# Altium PCB STM32.PcbDoc
Units mil, origin at the board's own origin, x right, y up, seen from the top; angles counter-clockwise.
Board outline 3937.01 x 3937.01 mil, 2 copper layers (Top Layer, Bottom Layer); 127 components, 126 nets, 543 pads, 82 vias.
Unrouted connection lines stored in the file: 192.
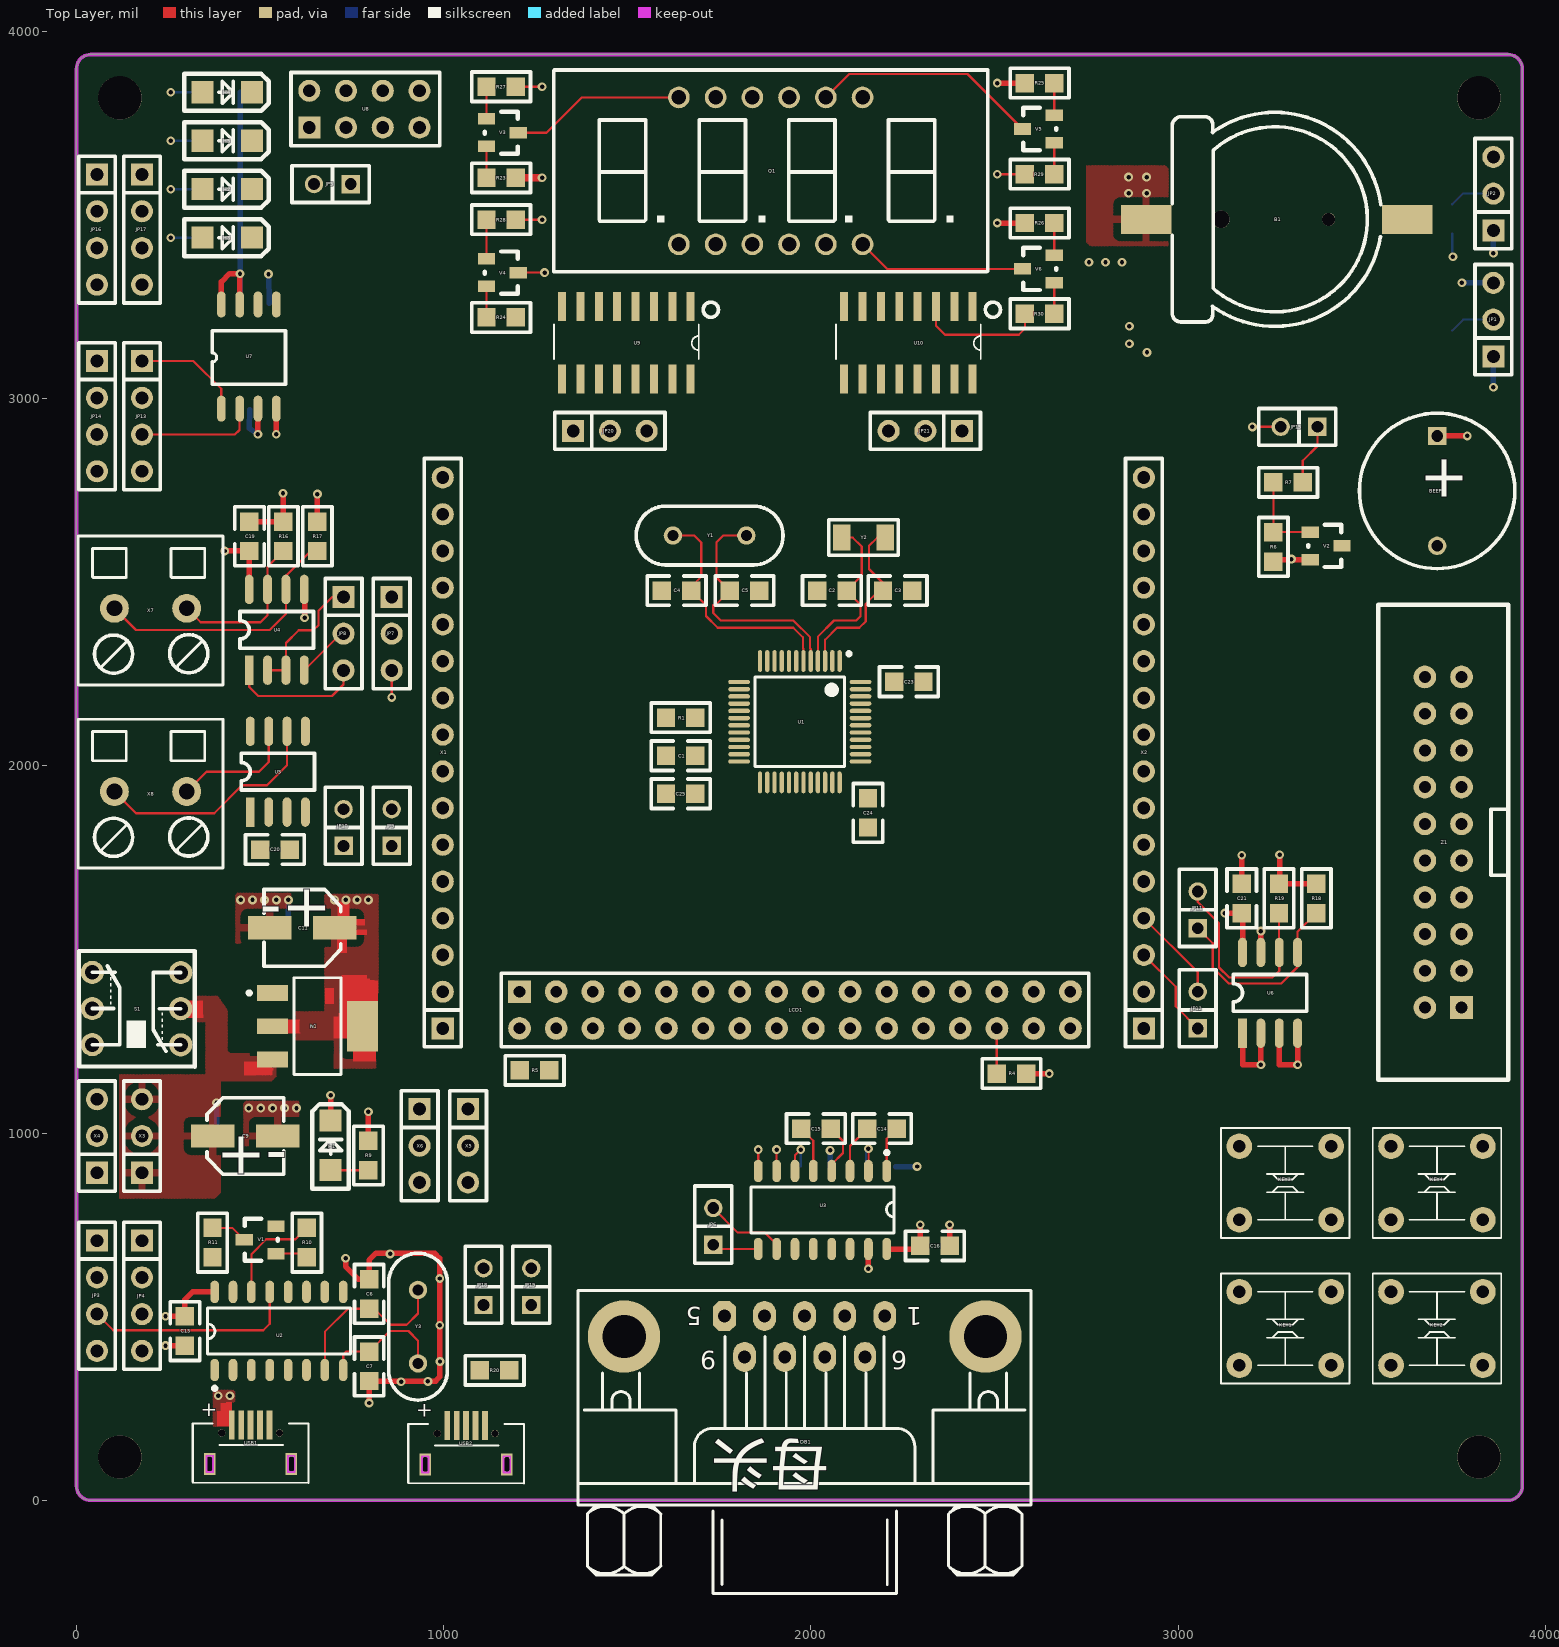
[diagram p0: Top Layer view]
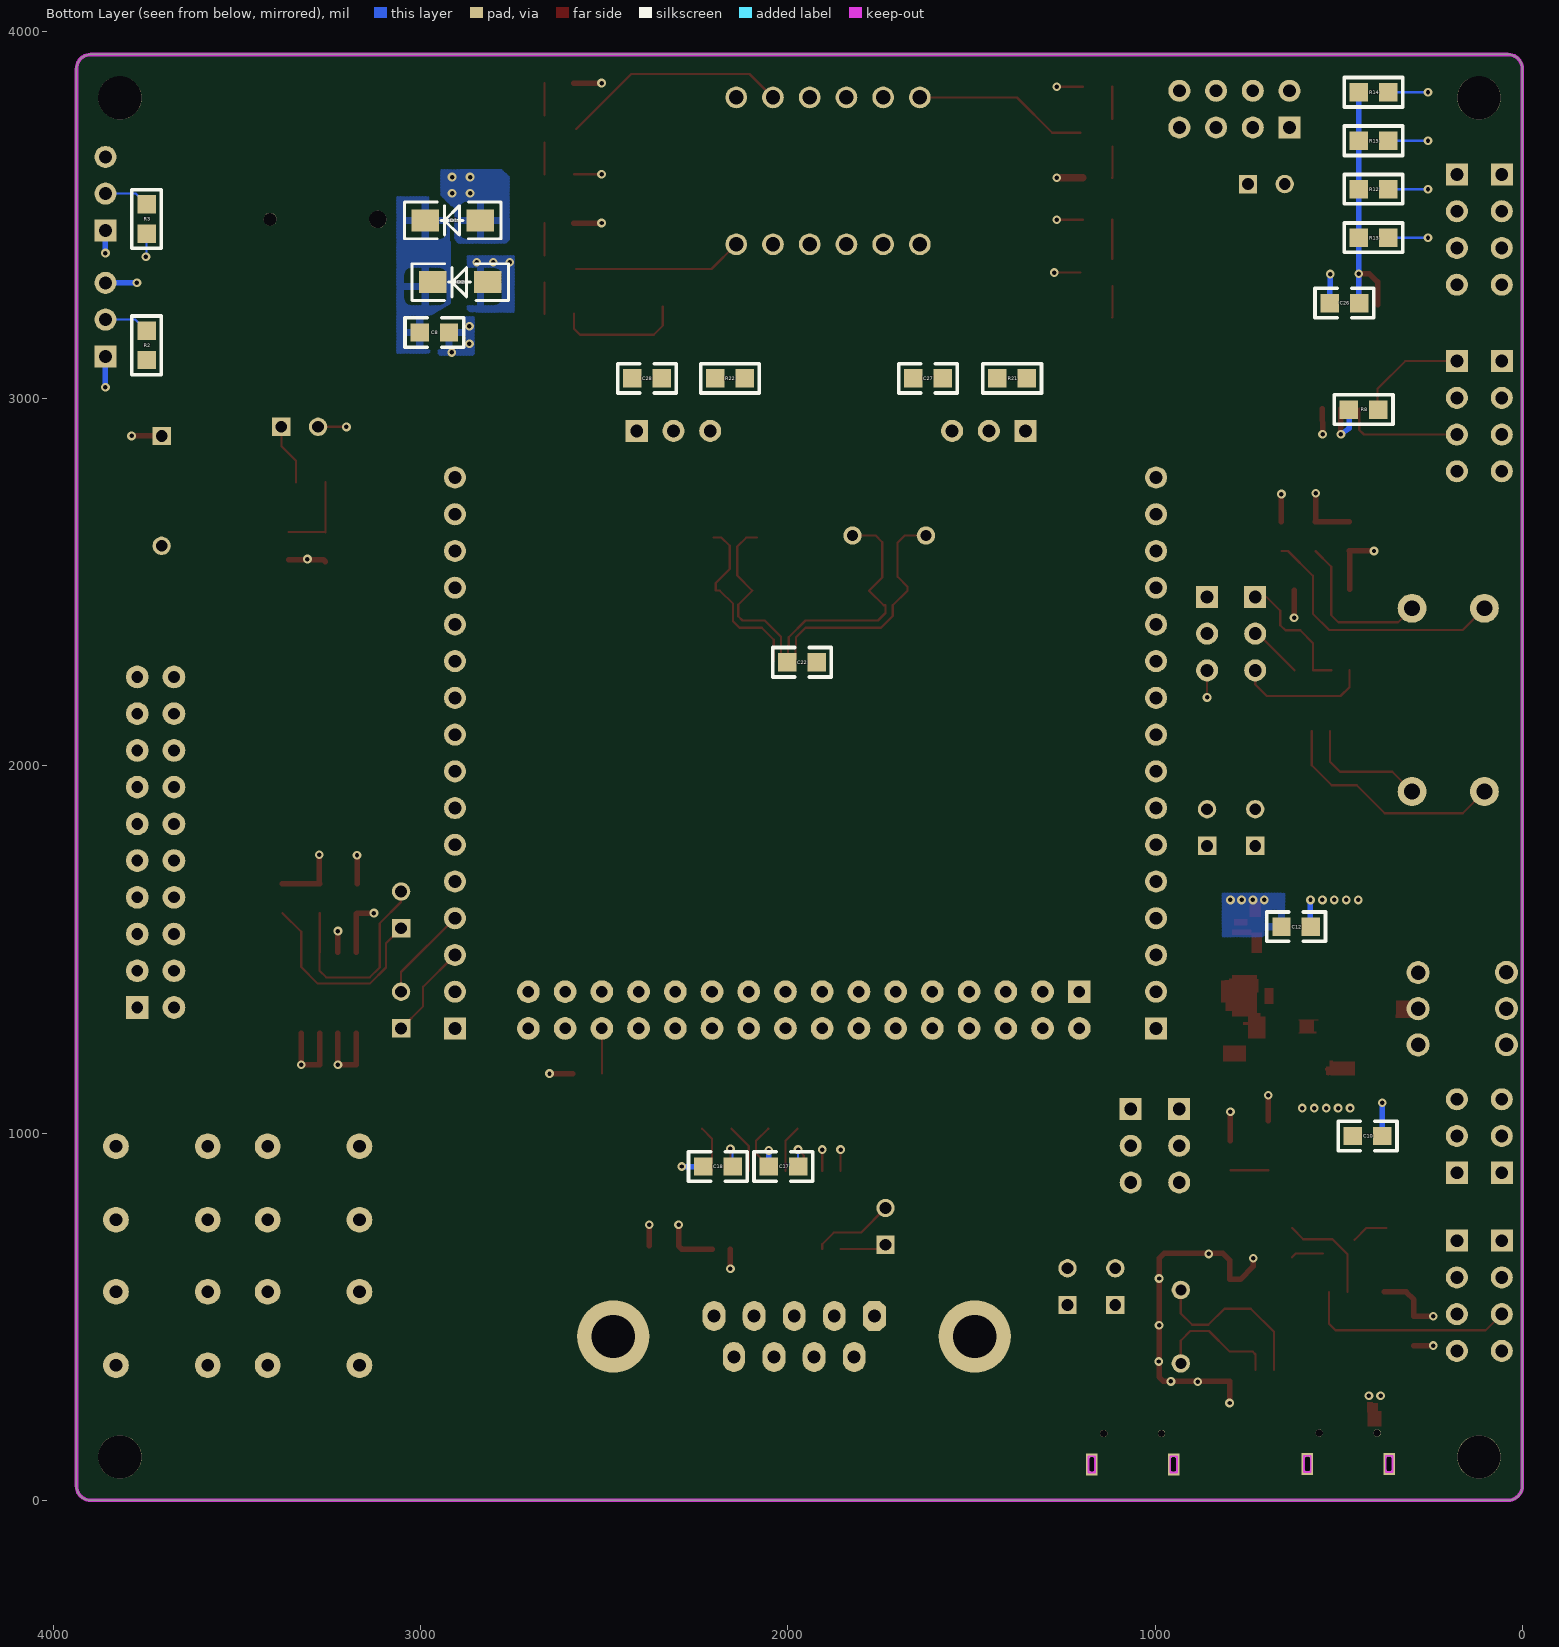
[diagram p1: Bottom Layer view, seen from below]

## Layer stack, top to bottom
Top Solder: solder mask 0.4, Solder Resist, Dk 3.5
Top Layer: signal copper 1.4
Dielectric 1: dielectric 12.6, FR-4, Dk 4.8
Bottom Layer: signal copper 1.4
Bottom Solder: solder mask 0.4, Solder Resist, Dk 3.5

## Board outline
0,39.37 0,3897.63 cw(c39.37,3897.63) 39.37,3937 39.37,3937.01 3897.64,3937.01 3897.63,3937 cw(c3897.63,3897.63) 3937,3897.63 3937.01,3897.64 3937.01,39.37 3937,39.37 cw(c3897.63,39.37) 3897.63,0 39.37,0 cw(c39.37,39.37)

## Design rules (kind name [scope] priority, off if disabled: settings)
Clearance via-polygon [IsVia vs Inpolygon] p1: gap=6 ignorepadtopadclearanceinfootprint=FALSE
Clearance polygon [InPolygon] p2: gap=10 ignorepadtopadclearanceinfootprint=FALSE
Clearance all [All] p3: gap=6 ignorepadtopadclearanceinfootprint=FALSE
DiffPairsRouting DiffPairsRouting_90OM [All] p1: maxlimit=7 minlimit=7 mostfreqgap=7 toplayer_minwidth=6 toplayer_maxwidth=6 toplayer_prefwidth=6 bottomlayer_minwidth=6 bottomlayer_maxwidth=6 bottomlayer_prefwidth=6 maxuncoupledlength=500
DiffPairsRouting [All] p2: maxlimit=10 minlimit=10 mostfreqgap=10 toplayer_minwidth=15 toplayer_maxwidth=15 toplayer_prefwidth=15 bottomlayer_minwidth=15 bottomlayer_maxwidth=15 bottomlayer_prefwidth=15 maxuncoupledlength=500
PolygonConnect PolygonConnect_via [IsVia] p1: connectstyle=Direct reliefconductorwidth=10 reliefentries=4 polygonreliefangle="90 Angle" airgapwidth=10
PolygonConnect [All] p2: connectstyle=Relief reliefconductorwidth=20 reliefentries=4 polygonreliefangle="90 Angle" airgapwidth=20
RoutingVias [All] p1: holewidth=12 width=24 viastyle="Through Hole" minholewidth=12 minwidth=24 maxholewidth=12 maxwidth=24
SilkToSilkClearance [All] p1: silktosilkclearance=2
SilkToSolderMaskClearance [IsPad] p1: minsilkscreentomaskgap=2 clearancetoexposedcopper=TRUE
SolderMaskExpansion [All] p1: expansion=4
Width PWR [InNetClass('PWR')] p1: maxlimit=60 minlimit=8 preferedwidth=15
Width [All] p2: maxlimit=6 minlimit=6 preferedwidth=6
27 further rules are at their usual default settings.

## Classes and differential pairs
net class PWR: 3V3 5V GND VBAT VUSB
differential pair class 90OM: usb1 USB1_diff USB2_diff
differential pair USB1_diff: +NetU2_5 -NetU2_6
differential pair USB2_diff: +D+ -D-

## Components (designator, comment, footprint, x,y, rotation, side; value= is the part's Value field where it differs from the comment)
B1 "BATTERY" CR1220 2912.42,3488 r0 top
BEEP1 "BEEP" SOT12-7.6 3705,2898.21 r270 top
C1 "100nF" C0805 1685.41,2027.5 r180 top
C2 "15pF" C0805 2097,2477 r180 top
C3 "15pF" C0805 2196,2477 r0 top
C4 "22pF" C0805 1674,2477 r180 top
C5 "22pF" C0805 1779,2477 r0 top
C6 "22pF" C0805 797,602 r270 top
C7 "22pF" C0805 797,325 r90 top
C8 "100nF" C0805 2922.44,3180 r0 bottom
C9 "100uF" CAP5*5_4 371.41,992 r0 top
C10 "100nF" C0805 381.41,992 r0 bottom
C11 "100uF" CAP5*5_4 703.57,1559 r180 top
C12 "100nF" C0805 656,1562 r180 bottom
C13 "100nF" C0805 295.41,421 r90 top
C14 "100nF" C0805 2153.41,1012 r0 top
C15 "100nF" C0805 1973.41,1012 r0 top
C16 "100nF" C0805 2297.41,693 r0 top
C17 "100nF" C0805 1972,909 r0 bottom
C18 "100nF" C0805 2150.41,909 r0 bottom
C19 "100nF" C0805 471,2585 r90 top
C20 "100nF" C0805 500.41,1772 r0 top
C21 "100nF" C0805 3173,1679 r270 top
C22 "100nF" C0805 1921.41,2282 r0 bottom
C23 "100nF" C0805 2226.41,2229 r0 top
C24 "100nF" C0805 2155.41,1912 r270 top
C25 "100nF" C0805 1685.41,1924 r180 top
C26 "100nF" C0805 524.41,3260 r180 bottom
C27 "100nF" C0805 1658.41,3055 r180 bottom
C28 "100nF" C0805 2423.41,3055 r180 bottom
D1 "1N5819" 1N4148-T 2837,3485 r0 bottom
D2 "1N5819" 1N4148-T 2817,3317 r0 bottom
DB1 "DB9M" DB9-M 1949.41,219 r180 top
H1 "发光二极管" LED1206 692,899 r90 top
H2 "发光二极管" LED1206 343.41,3570 r0 top
H3 "发光二极管" LED1206 343.41,3438 r0 top
H4 "发光二极管" LED1206 343.41,3834 r0 top
H5 "发光二极管" LED1206 343.41,3702 r0 top
JP1 "JX3" SIP3 3858,3115 r90 top
JP2 "JX3" SIP3 3858,3458 r90 top
JP3 "JX4" SIP4 56.05,707 r270 top
JP4 "JX4" SIP4 178.41,707 r270 top
JP5 "JX2" SIP2 747,3584 r180 top
JP6 "JX2" SIP2 1734,696 r90 top
JP7 "JX3" SIP3 858.41,2460 r270 top
JP8 "JX3" SIP3 727.41,2460 r270 top
JP9 "JX2" SIP2 858.41,1782 r90 top
JP10 "JX2" SIP2 727.41,1782 r90 top
JP11 "JX2" SIP2 3053,1558 r90 top
JP12 "JX2" SIP2 3053,1285 r90 top
JP13 "JX4" SIP4 178.41,3102 r270 top
JP14 "JX4" SIP4 56.05,3102 r270 top
JP15 "JX2" SIP2 3379,2923 r180 top
JP16 "JX4" SIP4 56.05,3610 r270 top
JP17 "JX4" SIP4 178.41,3610 r270 top
JP18 "JX2" SIP2 1108.41,532 r90 top
JP19 "JX2" SIP2 1238.41,532 r90 top
JP20 "JX3" SIP3 1352.69,2912 r0 top
JP21 "JX3" SIP3 2411.41,2912 r180 top
KEY1 "SW-66B7" SW-66 3166.41,568 r0 top
KEY2 "SW-66B7" SW-66 3579.41,568 r0 top
KEY3 "SW-66B7" SW-66 3166.41,964 r0 top
KEY4 "SW-66B7" SW-66 3579.41,964 r0 top
LCD1 "TFT32LCD" HEAD16×2 1206.41,1385 r90 top
N1 "AMS1117-3.3V" SOT223 655.04,1303.87 r270 top
Q1 "LED-4-YANG-36" LED0.36-4 2140.41,3420 r0 top
R1 "10K" R0805 1605.41,2131 r0 top
R2 "10K" R0805 3746,3105 r90 bottom
R3 "10K" R0805 3746,3449 r90 bottom
R4 "10K" R0805 2586,1162 r180 top
R5 "10K" R0805 1287.41,1171 r180 top
R6 "10K" R0805 3259,2556 r90 top
R7 "4.7K" R0805 3339,2772 r180 top
R8 "10K" R0805 392.41,2970 r0 bottom
R9 "1K" R0805 795,979 r270 top
R10 "4.7K" R0805 627.41,742 r270 top
R11 "10K" R0805 370.41,742 r270 top
R12 "1K" R0805 445.41,3570 r180 bottom
R13 "1K" R0805 445.41,3438 r180 bottom
R14 "1K" R0805 445.41,3834 r180 bottom
R15 "1K" R0805 445.41,3702 r180 bottom
R16 "1K" R0805 563.5,2585 r90 top
R17 "1K" R0805 656,2585 r90 top
R18 "4.7K" R0805 3376,1599 r90 top
R19 "4.7K" R0805 3274.5,1599 r90 top
R20 "1K" R0805 1098.41,354 r0 top
R21 "10K" R0805 1429.41,3055 r180 bottom
R22 "10K" R0805 2197.41,3055 r180 bottom
R23 "120" R0805 1116.41,3601 r0 top
R24 "120" R0805 1116.41,3221 r0 top
R25 "120" R0805 2662.41,3859 r180 top
R26 "120" R0805 2662.41,3478 r180 top
R27 "4.7K" R0805 1196.41,3849 r180 top
R28 "4.7K" R0805 1196.41,3487 r180 top
R29 "4.7K" R0805 2582.41,3611 r0 top
R30 "4.7K" R0805 2582.41,3231 r0 top
S1 "SWITCH-6" SW-AJ 163.66,1339 r180 top
U1 "STM32F103C8T6" LQFP48 2077.91,2285.51 r270 top
U2 "CH340G" SOIC16 376.41,355 r90 top
U3 "SP3232E" SOIC16 2206.41,897 r270 top
U4 "SP3485" SO-8 470.41,2484.81 r90 top
U5 "CAN-PCA82C250" SO-8 473.41,2098.41 r90 top
U6 "AT24C02" SO-8 3175,1496.41 r90 top
U7 "W25Q80BL" W25Q-SO8 394.41,2972.54 r90 top
U8 "NRF24L01" NRF24L01 634,3738 r0 top
U9 "74HC595" SO-16 1497.41,3152 r180 top
U10 "74HC595" SO-16 2265.41,3152 r180 top
USB1 "MicroUSB" MicroUSB1 423.01,205.3 r0 top
USB2 "MicroUSB" MicroUSB1 1009.82,204 r0 top
V1 "S8050" SOT23-C1 543.41,746.8 r90 top
V2 "S8050" SOT23-C1 3359.39,2561.6 r270 top
V3 "S8550" SOT23-C1 1116.39,3686.6 r270 top
V4 "S8550" SOT23-C1 1116.39,3305.6 r270 top
V5 "S8550" SOT23-C1 2662.61,3771.4 r90 top
V6 "S8550" SOT23-C1 2662.61,3390.4 r90 top
X1 "JX16" SIP16 997.41,1285 r90 top
X2 "JX16" SIP16 2906.41,1285 r90 top
X3 "JX3" SIP3 178.41,892 r90 top
X4 "JX3" SIP3 56.05,892 r90 top
X5 "JX3" SIP3 1066.41,1065.4 r270 top
X6 "JX3" SIP3 934.41,1065.4 r270 top
X7 "JX2" WJ128-5.0-2P 103.41,2429 r0 top
X8 "JX2" WJ128-5.0-2P 103.41,1930 r0 top
Y1 "8M" JZ-AX 1824,2627 r180 top
Y2 "32.768K" FC135 2145,2621 r180 top
Y3 "12M" JZ-AX 930,573 r270 top
Z1 "HEADER 10X2" JTAG 3771.41,1342 r90 top

## Footprints (in the part's own frame and the unit in brackets; to place one, negate y for a bottom-side part, rotate by r counter-clockwise, add the part's x,y. Pads: shape width x height; smd on the part's side, far side on the other; paste and mask are expansions set on the pad)
1N4148-T [mil]
  rect 75x60 smd: 1(0,0) 2(150,0)
  silkscreen extent -56,-50 206,50
C0805 [mil]
  rect 50x50 smd: 1(0,0) 2(80,0)
  silkscreen extent -40,-40 120,40, body extent 1,-24 79,25, height 31
CAP5*5_4 [mm]
  rect 3x1.6 smd: 1(0,0) 2(4.5,0)
  silkscreen extent -0.4,-2.65 4.9,2.65, body extent -0.77,-2.67 5.13,2.63, height 5.41
CR1220 [mm]
  rect 3.5x2 smd: 1(0,0) 2(18.067,0)
  round 1.2 hole 1.2: 3(5.181,0)
  round 0.9 hole 0.9: 4(12.631,0)
  silkscreen extent 1.81,-7.4 16.24,7.4
DB9-M [mil] "ĸͷ"
  oval 62x82 hole 35: 1(-251.63,-283.07) 2(-142.46,-283.07) 3(-33.29,-283.07) 4(75.87,-283.07) 7(-88.29,-171.4) 8(20.87,-171.4) 9(130.04,-171.4)
  oct 62x82 hole 35: 5(185.04,-283.07)
  oval 60x82 hole 35: 6(-197.46,-171.4)
  round 196.67 hole 118.33: BO1(-525.79,-227.24) BO2(458.37,-227.24)
  silkscreen extent -650,-352 583,473
FC135 [mm]
  rect 1.2x1.8 smd: 1(-1.451,-0.01) 2(1.549,-0.01)
  silkscreen extent -2.35,-1.23 2.45,1.21, body extent -1.54,-0.74 1.68,0.78, height 0.91
HEAD16×2 [mm]
  rect 1.57x1.57 hole 0.8: 1(0,0)
  round 1.57 hole 0.8: 2(-2.54,0) 3(0,-2.54) 4(-2.54,-2.54) 5(0,-5.08) 6(-2.54,-5.08) 7(0,-7.62) 8(-2.54,-7.62) 9(0,-10.16) 10(-2.54,-10.16) 11(0,-12.7) 12(-2.54,-12.7) 13(0,-15.24) 14(-2.54,-15.24) 15(0,-17.78) 16(-2.54,-17.78) 17(0,-20.32) 18(-2.54,-20.32) 19(0,-22.86) 20(-2.54,-22.86) 21(0,-25.4) 22(-2.54,-25.4) 23(0,-27.94) 24(-2.54,-27.94) 25(0,-30.48) 26(-2.54,-30.48) 27(0,-33.02) 28(-2.54,-33.02) 29(0,-35.56) 30(-2.54,-35.56) 31(0,-38.1) 32(-2.54,-38.1)
  silkscreen extent -3.81,-39.37 1.27,1.27
JTAG [mm] "JTAG-20PIN"
  rect 1.57x1.57 hole 0.82: 1(0,0)
  round 1.57 hole 0.82: 2(0,2.54) 3(2.54,0) 4(2.54,2.54) 5(5.08,0) 6(5.08,2.54) 7(7.62,0) 8(7.62,2.54) 9(10.16,0) 10(10.16,2.54) 11(12.7,0) 12(12.7,2.54) 13(15.24,0) 14(15.24,2.54) 15(17.78,0) 16(17.78,2.54) 17(20.32,0) 18(20.32,2.54) 19(22.86,0) 20(22.86,2.54)
  silkscreen extent -5,-3.23 27.86,5.77, body extent -5,-3.23 27.86,5.77, height 4
JZ-AX [mil]
  round 50 hole 30: 1(0,0) 2(200,0)
  silkscreen extent -100,-80 300,80
LED0.36-4 [mm] "0.36英寸4位数码管共阳"
  round 1.5 hole 1: 1(-12.7,0) 2(-10.16,0) 3(-7.62,0) 4(-5.08,0) 5(-2.54,0) 6(0,0) 7(0,10.16) 8(-2.54,10.16) 9(-5.08,10.16) 10(-7.62,10.16) 11(-10.16,10.16) 12(-12.7,10.16)
  silkscreen extent -21.35,-1.9 8.65,12.06
LED1206 [mil]
  rect 60x60 smd: 1(0,0) 2(135,0)
  silkscreen extent -50,-50 180,50
LQFP48 [mm] "LQFP48-7×7mm-STM32F051C8T6"
  oval 1.5x0.3 smd: 1(0,0) 2(0,-0.5) 3(0,-1) 4(0,-1.5) 5(0,-2) 6(0,-2.5) 7(0,-3) 8(0,-3.5) 9(0,-4) 10(0,-4.5) 11(0,-5) 12(0,-5.5) 25(8.4,-5.5) 26(8.4,-5) 27(8.4,-4.5) 28(8.4,-4) 29(8.4,-3.5) 30(8.4,-3) 31(8.4,-2.5) 32(8.4,-2) 33(8.4,-1.5) 34(8.4,-1) 35(8.4,-0.5) 36(8.4,0)
  oval 0.3x1.5 smd: 13(1.45,-6.95) 14(1.95,-6.95) 15(2.45,-6.95) 16(2.95,-6.95) 17(3.45,-6.95) 18(3.95,-6.95) 19(4.45,-6.95) 20(4.95,-6.95) 21(5.45,-6.95) 22(5.95,-6.95) 23(6.45,-6.95) 24(6.95,-6.95) 37(6.95,1.45) 38(6.45,1.45) 39(5.95,1.45) 40(5.45,1.45) 41(4.95,1.45) 42(4.45,1.45) 43(3.95,1.45) 44(3.45,1.45) 45(2.95,1.45) 46(2.45,1.45) 47(1.95,1.45) 48(1.45,1.45)
  silkscreen extent -0.62,-5.85 7.3,0.78
MicroUSB1 [mm] "MircroUSBĸͷ"
  rect 0.4x2 smd: 1(0,0) 2(0.65,0) 3(1.3,0) 4(1.95,0) 5(2.6,0)
  rect 0.8x1.5 hole 0.4 slot 1 at 90 deg: 6(-1.525,-2.7) 6(4.125,-2.7)
  round 0.5 hole 0.5 unplated: ""(-0.7,-0.55) ""(3.3,-0.55)
  Keep-Out Layer lines w0.127: -1.754,-3.243 -1.754,-2.125 -1.296,-2.125 -1.296,-3.243 -1.754,-3.243 ; 3.896,-3.243 3.896,-2.125 4.354,-2.125 4.354,-3.243 3.896,-3.243
  silkscreen extent -2.75,-4 5.3,0.1
NRF24L01 [mil]
  rect 60x60 hole 35: 1(0,0)
  round 60 hole 35: 2(0,100) 3(100,0) 4(100,100) 5(200,0) 6(200,100) 7(300,0) 8(300,100)
  silkscreen extent -50,-50 355,150
R0805 [mil]
  rect 50x50 smd: 1(0,0) 2(80,0)
  silkscreen extent -40,-40 120,40
SIP2 [mil]
  rect 50x50 hole 32: 1(0,0)
  round 50 hole 32: 2(100,0)
  silkscreen extent -50,-50 160,50
SIP3 [mil]
  rect 60x60 hole 35: 1(0,0)
  round 60 hole 35: 2(100,0) 3(200,0)
  silkscreen extent -50,-50 250,50
SIP4 [mil]
  rect 60x60 hole 35: 1(0,0)
  round 60 hole 35: 2(100,0) 3(200,0) 4(300,0)
  silkscreen extent -50,-50 350,50
SIP16 [mil]
  rect 60x60 hole 34.65: 1(0,0)
  round 60 hole 34.65: 2(100,0) 3(200,0) 4(300,0) 5(400,0) 6(500,0) 7(600,0) 8(700,0) 9(800,0) 10(900,0) 11(1000,0) 12(1100,0) 13(1200,0) 14(1300,0) 15(1400,0) 16(1500,0)
  silkscreen extent -50,-50 1552,50
SO-8 [mil]
  rect 80x24 smd: 1(-224.41,0)
  oval 80x24 smd: 2(-224.41,-50) 3(-224.41,-100) 4(-224.41,-150) 5(-4.41,-150) 6(-4.41,-100) 7(-4.41,-50) 8(-4.41,0)
  silkscreen extent -164,-175 -64,25
SO-16 [mm]
  rect 0.55x2 smd: 1(-4.445,-2.5) 2(-3.175,-2.5) 3(-1.905,-2.5) 4(-0.635,-2.5) 5(0.635,-2.5) 6(1.905,-2.5) 7(3.175,-2.5) 8(4.445,-2.5) 9(4.445,2.5) 10(3.175,2.5) 11(1.905,2.5) 12(0.635,2.5) 13(-0.635,2.5) 14(-1.905,2.5) 15(-3.175,2.5) 16(-4.445,2.5)
  silkscreen extent -6.37,-2.81 5,1.14, body extent -5.13,-2.87 5.07,3.13, height 1.7
SOIC16 [mm] "SOIC16-39MM"
  oval 1.55x0.6 smd: 1(0,0) 2(0,-1.27) 3(0,-2.54) 4(0,-3.81) 5(0,-5.08) 6(0,-6.35) 7(0,-7.62) 8(0,-8.89) 9(5.4,-8.89) 10(5.4,-7.62) 11(5.4,-6.35) 12(5.4,-5.08) 13(5.4,-3.81) 14(5.4,-2.54) 15(5.4,-1.27) 16(5.4,0)
  silkscreen extent -1.39,-9.4 4.3,0.51
SOT12-7.6 [mil] "有源蜂鸣器外径12间距7.6mm"
  rect 50x50 hole 32: 1(0,0)
  round 50 hole 32: 2(299.21,0)
  silkscreen extent -62,-212 361,212
SOT23-C1 [mm]
  rect 0.8x1.2 smd: B(-1.9,0) C(-0.95,2.2) E(0,0)
  silkscreen extent -2.41,-0.13 0.51,2.16
SOT223 [mm] "AMS1117-3.3V"
  rect 1.1x2.15 smd: 1(-1.973,-3.064) 2(0.327,-3.064) 3(2.627,-3.064)
  rect 3.5x2.15 smd: 4(0.327,3.136)
  silkscreen extent -3.02,-4.81 3.68,1.66
SW-66 [mil] "6×6轻触开关"
  round 70 hole 34.65: 1(0,0) 2(0,-200) 3(250,0) 4(250,-200)
  silkscreen extent -50,-250 300,50
SW-AJ [mm]
  round 1.6 hole 1: 1(-3.057,-2.494) 2(-3.057,2.505) 3(-3.057,0.006) 4(3.057,-2.505) 5(3.057,2.494) 6(3.057,-0.005)
  silkscreen extent -4.02,-4 3.98,4.01
W25Q-SO8 [mm]
  oval 1.8x0.6 smd: 1(0,0) 2(0,-1.27) 3(0,-2.54) 4(0,-3.81) 5(7.2,-3.81) 6(7.2,-2.54) 7(7.2,-1.27) 8(7.2,0)
  silkscreen extent 1.69,-4.44 5.4,0.64, body extent -0.45,-4.63 7.65,0.83, height 1.75
WJ128-5.0-2P [mm]
  round 2 hole 1.1: 1(5,0) 2(0,0)
  silkscreen extent -2.5,-5.3 7.5,5

## Part data
C1 C2 C3 C4 C5 C6 C7 C8 C10 C12 C13 C14 C15 C16 C17 C18 C19 C20 C21 C22 C23 C24 C25 C26 C27 C28: library part 普通贴片电容, "Capacitor"
C9 C11: library part 极性电容器
D1 D2: library part 贴片二极管, "Diode 1N series"
DB1 USB1 USB2: "ĸͷ"
JP1 JP2 JP3 JP4 JP5 JP6 JP7 JP8 JP9 JP10 JP11 JP12 JP13 JP14 JP15 JP16 JP17 JP18 JP19 JP20 JP21 X3 X4 X5 X6 X7 X8: "Connector"
R1 R2 R3 R8 R9 R10 R11 R12 R13 R14 R15 R16 R17 R18 R19 R20 R21 R22: library part 普通贴片电阻
R4 R5 R6 R7 R23 R24 R25 R26: library part RES
R27 R28 R29 R30: library part RES2
U3: "SP3232EEN-L/TR;SOIC-39MM"
U4: library part MAX3082
U9 U10: "串入并出移位寄存器"
V1 V2: library part NPN三极管, "V"
V3 V4 V5 V6: library part PNP三极管, "V"
Y1 Y2 Y3: library part CRYSTAL, "Crystal"

## Free pads (board coordinates)
  round 118.11 hole 118.11 unplated: 1(118.11,118.11) 2(3818.9,118.11) 3(3818.9,3818.9) 4(118.11,3818.9)

## Via types
v1: diameter 24, hole 12, Top Layer to Bottom Layer, 81 vias
v2: diameter 24, hole 12, Top Layer to Bottom Layer, tented both sides, 1 vias

## Nets (pads, with @x,y where several pads share a name; then routed paths per layer and width w, separated by ;. In a path a pad name is that pad's centre, name@x,y a point inside that pad or via, vN(x,y) a via of type N, cw(c..) or ccw(c..) an arc to the next point about the centre after c; other vN are vias at no path point)
3V3: BEEP1.1 C11.1 C12.1 C13.2 C16.1 C19.1 C20.2 C21.2 C22.1 C23.1 C24.1 C25.1 C26.2 C27.1 C28.1 D2.1 JP1.1 JP2.1 LCD1.2 N1.2 N1.4 R1.2 R4.1 R5.2 R8.2 R9.1 R11.2 R12.1 R13.1 R14.1 R15.1 R17.2 R18.2 R19.2 R20.2 R21.1 R22.1 R23.2 R24.2 R25.2 R26.2 U1.9 U1.24 U1.36 U1.48 U2.4 U2.16 U3.16 U4.8 U5.3 U6.8 U7.3 U7.7 U7.8 U8.2 U9.16 U10.16 X5.1 X5.2 X5.3 Z1.1 Z1.2 | length 2445.6
  Top Layer w15: v1@242,502 v1(242.5,501.5) 243,501 C13.2 295.41,546.41 316.6,567.6 U2.16 ; U7.8 394.41,3317.41 417,3340 v1(445.41,3340) 444.41,3339 U7.7 ; v1(404,2585) C19.1 470.41,2584.41 U4.8 ; v1(494,2903) U7.3 ; R17.2 v1(656,2740) ; R9.1 v1(795,1058) ; U3.16 2288.81,684.4 C16.1 v1(2297.41,750.41) ; v1(2507,3478) R26.2 ; v1(2507,3859) R25.2 ; R4.1 v1(2649,1162) ; v1(3127,1599) C21.2 3175,1597 U6.8 ; v1(3276,1758) 3276,1680.5 R19.2 R18.2 ; BEEP1.1 v1(3786.79,2898.21)
  Top Layer w20: R23.2 v1(1268,3601)
  Bottom Layer w15: C26.2 445.41,3261 v1(445.41,3340) R13.1 R12.1 R15.1 R14.1 ; R8.2 471,2919 v1(494,2903) ; v1(3858,3031) JP1.1 ; JP2.1 v1(3858,3396) v1@3859,3395
  other v1: 703,1635 733.67,1635 764.33,1635 795,1635 2802,3371 2847,3371
  other v2: 2757,3371
5V: C9.1 C10.1 N1.3 S1.3 X3.1 X3.2 X3.3 | length 90.6
  Bottom Layer w15: C10.1 v1(381.41,1082.59)
A: Q1.11 U9.15
AT_SCL: JP11.2 R19.1 U6.6 | length 570.9
  Top Layer w6: JP11.2 3053,1629 3111,1571 3111,1451 3138,1424 3257,1424 3275,1442 U6.6 3274.5,1492.5 R19.1
AT_SDA: JP11.1 R18.1 U6.5 | length 560
  Top Layer w6: JP11.1 3094,1517 3094,1451 3138,1407 3280,1407 3325,1452 U6.5 3325,1548 R18.1
B: Q1.7 U9.1
BEEP: JP15.2 U1.2 | length 77
  Top Layer w6: v1(3202,2923) JP15.2
BOOT0: JP4.4 R2.1 U1.44
BOOT1: R3.1 U1.20 X1.6 | length 63.8
  Bottom Layer w6: R3.1 3746,3388 v1(3748,3386)
C: Q1.4 U9.2
CANRXD: JP9.2 JP19.1 U1.32 X2.12
CANTXD: JP9.1 JP19.2 U1.33 X2.11
CH340_BOOT0: JP3.4 R11.1 V1.C | length 99.9
  Top Layer w6: R11.1 424.2,742 V1.C
CH340_RESET: JP3.3 U2.13 | length 582.9
  Top Layer w6: JP3.3 100.05,463 508.82,463 526.41,480.59 U2.13
CH340_RXD: JP3.1 U2.3
CH340_TXD: JP3.2 U2.2
CH340_XI: C6.2 U2.7 Y3.1 | length 478.8
  Top Layer w6: U2.7 676.41,459 739.41,522 C6.2 811,522 855,478 899,478 930,509 Y3.1
CH340_XO: C7.2 U2.8 Y3.2 | length 345.1
  Top Layer w6: U2.8 726.41,397.41 734,405 C7.2 853,461 904,461 930,435 Y3.2
D: Q1.2 U9.3
D+: JP18.2 R20.1 USB2.3
D-: JP18.1 USB2.2
DAT2: U9.9 U10.14
DP: Q1.3 U9.7
E: Q1.1 U9.4
F: Q1.10 U9.5
G: Q1.5 U9.6
GND: B1.2 C1.1 C2.2 C3.2 C4.2 C5.2 C6.1 C7.1 C8.1 C9.2 C10.2 C11.2 C12.2 C13.1 C16.2 C17.2 C18.2 C19.2 C20.1 C21.1 C22.2 C23.2 C24.2 C25.2 C26.1 C27.2 C28.2 DB1.5 H1.2 JP1.3 JP2.3 KEY1.1 KEY1.3 KEY2.1 KEY2.3 KEY3.1 KEY3.3 KEY4.1 KEY4.3 LCD1.1 N1.1 R6.1 R16.2 U1.8 U1.23 U1.35 U1.47 U2.1 U3.15 U4.5 U5.2 U5.8 U6.1 U6.2 U6.3 U6.4 U6.7 U7.4 U8.1 U9.8 U9.13 U10.8 U10.13 USB1.5 USB2.5 V1.E V2.E X4.1 X4.2 X4.3 X6.1 X6.2 X6.3 Z1.4 Z1.6 Z1.8 Z1.10 Z1.12 Z1.14 Z1.16 Z1.18 Z1.20 | length 2503.4
  Top Layer w15: v1@242,422 v1(242.5,421.5) 243,421 C13.1 ; C19.2 R16.2 ; v1(544,2903) U7.4 ; R16.2@562.5,2667 v1(562.5,2742) ; v1(621.41,2403.4) U4.5@621.41,2478.4 ; H1.2 v1(692,1103) ; v1(733,659) 733,637 768,602 C6.1 797,654 816,673 975,673 989,659 v1(989,604) v1(989,477) 989,336 978,325 C7.1 v1(797,265) ; v1(2156.41,630.59) U3.15 ; C16.2 v1(2377.41,750.41) ; C21.1 v1(3173,1756.5) ; U6.1 3175,1186 v1(3225,1186) U6.2 ; U6.7 v1(3225,1550) ; R6.1 3264.6,2561.6 V2.E ; U6.3 3275,1186 v1(3325,1186) U6.4
  Bottom Layer w15: v1(523,3339) C26.1 ; C12.2 577,1563 v1@577,1631 ; C17.2 v1(2052,953) ; C18.2 v1(2289,909) ; v1@3772,3316 v1(3772.5,3315.5) 3773,3315 JP1.3
  other v1: 884,323 957,324 990,378 854,671 469.16,1068 501.66,1068 534.16,1068 566.66,1068 599.16,1068 447,1635 479.5,1635 512,1635 544.5,1635 577,1635 3308,2563 2915,3125.75 2867,3149 2867,3197
HC_CLK: JP20.1 U9.11 U10.11
HC_DAT: JP20.3 U9.14
HC_RCK: JP20.2 U9.12 U10.12
I2C1_SCL: JP12.2 LCD1.21 U1.42 X2.4 | length 260.7
  Top Layer w6: X2.4 3053,1438.41 JP12.2
I2C1_SDA: JP12.1 LCD1.22 U1.43 X2.3 | length 260.7
  Top Layer w6: X2.3 2993,1398.41 2993,1345 JP12.1
JTCK: KEY4.2 KEY4.4 U1.37 X2.9 Z1.9
JTDI: KEY2.2 KEY2.4 U1.38 X2.8 Z1.5
JTDO: LCD1.18 U1.39 X2.7 Z1.13
JTMS: KEY3.2 KEY3.4 U1.34 X2.10 Z1.7
JTRST: LCD1.19 U1.40 X2.6 Z1.3
KEY1: C1.2 JP4.3 KEY1.2 KEY1.4 LCD1.9 R1.1 U1.7 Z1.15
LCD_BL: JP4.2 JP7.3 LCD1.26 U1.31 X2.13 | length 73.6
  Top Layer w6: v1(858.41,2186.41) JP7.3
LCD_CS: LCD1.3 R5.1 U1.10 X1.16
LCD_DB10: LCD1.20 U1.41 X2.5
LCD_DB13: LCD1.23 U1.45 X2.2
LCD_DB14: LCD1.24 U1.46 X2.1
LCD_DB15: LCD1.25 U1.21 X1.5
LCD_RD: LCD1.6 U1.22 X1.4
LCD_SCK: LCD1.4 U1.25 X1.3
LCD_WR: LCD1.5 U1.19 X1.7
LED1: JP14.1 JP17.4 U1.14 X1.12
LED2: JP14.2 JP17.3 U1.15 U8.5 X1.11
LED3: JP14.3 JP17.2 U1.16 U8.7 X1.10
LED4: JP14.4 JP17.1 U1.17 U8.6 X1.9
NetB1_1: B1.1 D1.1
  other v1: 2865,3559 2914,3559 2865,3603 2914,3603
NetBEEP1_2: BEEP1.2 V2.C | length 1.1
  Top Layer w6: BEEP1.2@3704.24,2599.76 BEEP1.2
NetC14_1: C14.1 U3.3 | length 134.5
  Top Layer w6: U3.3 2106.41,965 C14.1
NetC14_2: C14.2 U3.1 | length 126.2
  Top Layer w6: U3.1 2206.41,985 C14.2
NetC15_1: C15.1 U3.5 | length 128.7
  Top Layer w6: C15.1 2006.41,979 U3.5
NetC15_2: C15.2 U3.4 | length 141.6
  Top Layer w6: C15.2 2087,978.41 2087,946 2056.41,915.41 U3.4
NetC17_1: C17.1 U3.6 | length 110.5
  Top Layer w6: U3.6 1956.41,939.41 v1(1972,955)
  Bottom Layer w6: C17.1 v1(1972,955)
NetC18_1: C18.1 U3.2 | length 111.3
  Top Layer w6: U3.2 v1(2156.41,957.41)
  Bottom Layer w6: C18.1 2150.41,951.41 v1(2156.41,957.41)
NetDB1_2: DB1.2 U3.7 | length 50.6
  Top Layer w6: U3.7 v1@1906.41,947.59
  other v1: 1906.41,955
NetDB1_3: DB1.3 U3.8 | length 50.6
  Top Layer w6: U3.8 v1@1856.41,947.59
  other v1: 1856.41,955
NetH1_1: H1.1 R9.2 | length 103
  Top Layer w6: H1.1 R9.2
NetH2_1: H2.1 R12.2 | length 108.4
  Bottom Layer w6: v1(257,3570) R12.2
NetH2_2: H2.2 JP16.1
NetH3_1: H3.1 R13.2 | length 108.4
  Bottom Layer w6: v1(257,3438) R13.2
NetH3_2: H3.2 JP16.2
NetH4_1: H4.1 R14.2 | length 108.4
  Bottom Layer w6: v1(257,3834) R14.2
NetH4_2: H4.2 JP16.3
NetH5_1: H5.1 R15.2 | length 108.4
  Bottom Layer w6: v1(257,3702) R15.2
NetH5_2: H5.2 JP16.4
NetJP1_2: JP1.2 R2.2 | length 124.4
  Bottom Layer w6: R2.2 3776,3215 JP1.2
NetJP2_2: JP2.2 R3.2 | length 124
  Bottom Layer w6: R3.2 3775,3558 JP2.2
NetJP8_1: JP8.1 U4.2 U4.3 | length 355.9
  Top Layer w6: U4.2 U4.3 570.41,2334.41 605,2369 645,2369 659,2383 659,2422 697,2460 JP8.1
NetJP8_2: JP8.2 U4.4 | length 148.3
  Top Layer w6: U4.4 720.01,2360 JP8.2
NetJP8_3: JP8.3 U4.1 | length 364.6
  Top Layer w6: U4.1 470.41,2214.59 495,2190 696,2190 727.41,2221.41 JP8.3
NetJP10_1: JP10.1 U5.1
NetJP10_2: JP10.2 U5.4
NetJP15_1: JP15.1 R7.1 | length 167.6
  Top Layer w6: R7.1 3339,2831 3379,2871 JP15.1
NetR6_2: R6.2 R7.2 V2.B | length 236.6
  Top Layer w6: R7.2 R6.2 3259.4,2636.4 V2.B
NetR10_1: R10.1 U2.14 | length 283.5
  Top Layer w6: U2.14 476.41,670.41 517,711 596.41,711 R10.1
NetR10_2: R10.2 V1.B | length 88.1
  Top Layer w6: V1.B 617.41,672 R10.2
NetR16_1: R16.1 U4.7 X7.1 | length 436.4
  Top Layer w6: X7.1 338.26,2391 501,2391 520.41,2410.41 U4.7 520.41,2541.91 R16.1
NetR17_1: R17.1 U4.6 X7.2 | length 726.4
  Top Layer w6: X7.2 162.41,2370 526,2370 570.41,2414.41 U4.6 570.41,2517.41 638,2585 R17.1
NetR21_2: R21.2 U9.10
NetR22_2: R22.2 U10.10
NetR23_1: R23.1 V3.E | length 85.6
  Top Layer w6: R23.1 V3.E
NetR24_1: R24.1 V4.E | length 84.6
  Top Layer w6: R24.1 V4.E
NetR25_1: R25.1 V5.E | length 87.7
  Top Layer w6: R25.1 2662.41,3771.61 V5.E
NetR26_1: R26.1 V6.E | length 87.7
  Top Layer w6: R26.1 2662.41,3390.61 V6.E
NetR27_2: R27.2 V3.B | length 87.6
  Top Layer w6: V3.B R27.2
NetR28_2: R28.2 V4.B | length 106.6
  Top Layer w6: V4.B R28.2
NetR29_2: R29.2 V5.B | length 85.7
  Top Layer w6: R29.2 2662.61,3611.2 V5.B
NetR30_2: R30.2 V6.B | length 84.7
  Top Layer w6: R30.2 2662.61,3231.2 V6.B
NetU2_5: U2.5 USB1.3
NetU2_6: U2.6 USB1.2
NetU5_6: U5.6 X8.2 | length 641
  Top Layer w6: X8.2 162.41,1871 375,1871 451,1947 519,1947 573.41,2001.41 U5.6
NetU5_7: U5.7 X8.1 | length 339.9
  Top Layer w6: X8.1 354.26,1984 496.82,1984 523.41,2010.59 U5.7
NRF_CE: JP5.2 JP21.2 U1.12 U8.3 X1.14
NRF_CS: JP21.1 U1.11 U8.4 X1.15
NRF_IRQ: JP5.1 JP21.3 U1.13 U8.8 X1.13
OSC32_IN: C3.1 U1.3 Y2.1 | length 489.9
  Top Layer w6: U1.3 2038.54,2343.54 2071,2376 2131.84,2376 2148.92,2393.08 2148.92,2440.92 2185,2477 C3.1 2196,2498 2158,2536 2158,2599 2180.39,2621.39 Y2.1
OSC32_OUT: C2.1 U1.4 Y2.2 | length 492
  Top Layer w6: U1.4 2018.86,2351.7 2062.85,2395.69 2123.69,2395.69 2135,2407 2135,2439 C2.1 2138,2518 2138,2597 2113.61,2621.39 Y2.2
OSC_IN: C5.1 U1.5 Y1.1 | length 674.1
  Top Layer w6: Y1.1 1761,2627 1743,2609 1743,2513 C5.1 1739,2437 1734,2437 1734,2416 1754.31,2395.68 1952,2395.68 1997.69,2350 1997.69,2319.53 1999.17,2318.04 U1.5
OSC_OUT: C4.1 U1.6 Y1.2 | length 665.8
  Top Layer w6: Y1.2 1682,2627 1701,2608 1701,2515 1674,2488 C4.1 1674.31,2477 1714.31,2437 1714.31,2407.85 1746.16,2376 1952,2376 1978,2350 1978,2319.53 1979.49,2318.04 U1.6
OUT1: R27.1 U10.15 | length 71.6
  Top Layer w6: R27.1 v1(1268,3849)
OUT2: R28.1 U10.1 | length 71.6
  Top Layer w6: R28.1 v1(1268,3487)
OUT3: R29.1 U10.2 | length 75.4
  Top Layer w6: v1(2507,3611) R29.1
OUT4: R30.1 U10.3 | length 351.4
  Top Layer w6: U10.3 2340.41,3198.59 2365,3174 2566,3174 2582.41,3190.41 R30.1
PA8: JP7.1 LCD1.32 U1.29 X2.15
PA9: JP4.1 JP7.2 U1.30 X2.14
PB0: LCD1.28 R4.2 U1.18 X1.8 | length 123.2
  Top Layer w6: R4.2 2506,1284.59 LCD1.28
PB13: LCD1.27 U1.26 X1.2
PB14: LCD1.31 U1.27 X1.1
PB15: LCD1.29 U1.28 X2.16
R2OUT: JP6.1 U3.9 | length 127.2
  Top Layer w6: JP6.1 1745.6,684.4 U3.9
S1: Q1.12 V3.C | length 477.2
  Top Layer w6: V3.C 1280,3724 1376,3820 Q1.12
S2: Q1.9 V4.C | length 71.6
  Top Layer w6: V4.C v1(1274.59,3343)
S3: Q1.8 V5.C | length 624.2
  Top Layer w6: Q1.8 2104.41,3884 2426,3884 V5.C
S4: Q1.6 V6.C | length 463.4
  Top Layer w6: Q1.6 2207.61,3352.8 V6.C@2576,3352.8
SP_CS: JP13.1 R8.1 U7.1 | length 301.3
  Top Layer w6: JP13.1 319,3102 394.41,3026.59 U7.1
SP_MISO: JP13.3 U7.2 | length 328.8
  Top Layer w6: JP13.3 431.42,2902 444.04,2914.63 U7.2
SP_MOSI: JP13.4 U7.5
SP_SCK: JP13.2 U7.6
T2IN: JP6.2 U3.10 | length 226.4
  Top Layer w6: JP6.2 1801,729 1875,729 1906.41,697.59 U3.10
VBAT: C8.2 D1.2 D2.2 U1.1
VUSB: S1.2 USB1.1 USB2.1
  other v1: 386,285 418,285
pads on no net: B1.3 B1.4 DB1.1 DB1.4 DB1.6 DB1.7 DB1.8 DB1.9 DB1.BO1 DB1.BO2 LCD1.7 LCD1.8 LCD1.10 LCD1.11 LCD1.12 LCD1.13 LCD1.14 LCD1.15 LCD1.16 LCD1.17 LCD1.30 S1.1 S1.4 S1.5 S1.6 U2.9 U2.10 U2.11 U2.12 U2.15 U3.11 U3.12 U3.13 U3.14 U5.5 U10.4 U10.5 U10.6 U10.7 U10.9 USB1. USB1.4 USB1.6 USB2. USB2.4 USB2.6 Z1.11 Z1.17 Z1.19

## Polygon pours and split planes (outlines as drawn)
GND on Bottom Layer "Mechanical 1-No Net" (hatched 90Degree grid 4 track 5, remove dead copper, pour order 6): 2951,3221 2951,3122 2948,3119 2857,3119 2854,3122 2854,3222 2896,3222 2897,3221
VBAT on Bottom Layer "Mechanical 1-No Net" (hatched 90Degree grid 4 track 5, remove dead copper, pour order 4): 2949,3495 2919,3495 2919,3260 2976,3225 2976,3124 3064,3124 3064,3549 2978,3549 2978,3537
NetB1_1 on Bottom Layer "Mechanical 1-No Net" (hatched 90Degree grid 4 track 5, remove dead copper, pour order 2): 2779,3623 2945,3623 2945,3555 2913,3523 2907,3523 2907,3434 2897,3424 2768,3424 2759,3433 2759,3603
3V3 on Bottom Layer "Mechanical 1-No Net" (hatched 90Degree grid 4 track 5, remove dead copper, pour order 10): 2758,3388 2873,3388 2873,3244 2865,3236 2745,3236 2745,3388 2746,3389 2763,3389
3V3 on Bottom Layer "Mechanical 1-No Net" (hatched 90Degree grid 4 track 5, remove dead copper, pour order 24): 648,1653 648,1535 817,1535 817,1652 651,1652 649,1654
NetB1_1 on Top Layer "Mechanical 1-No Net" (hatched 90Degree grid 4 track 5, remove dead copper, pour order 12): 2972,3416 2761,3416 2751,3426 2751,3633 2965,3633 2972,3626
5V on Top Layer "Mechanical 1-No Net" (hatched 90Degree grid 4 track 5, remove dead copper, pour order 14): 384.3,1372 410,1334 410,1225 409,1224 417,1216 574,1216 574,1186 531,1143 353,1143 353,1304 262,1304 262,1372
3V3 on Top Layer "Mechanical 1-No Net" (hatched 90Degree grid 4 track 5, remove dead copper, pour order 16): 501,1329 504,1326 504,1255 703,1255 703,1177 815,1177 815,1376 815,1392 728,1392 690,1354 690,1330 501,1330 500,1329 504,1325 504,1257
3V3 on Top Layer "Mechanical 1-No Net" (hatched 90Degree grid 4 track 5, remove dead copper, pour order 18): 821,1650 821,1317 677,1317 677,1650
5V on Top Layer "Mechanical 1-No Net" (hatched 90Degree grid 4 track 5, remove dead copper, pour order 20): 118,1158 391,1158 391,838 376,823 118,823
GND on Top Layer "Mechanical 1-No Net" (hatched 90Degree grid 4 track 5, remove dead copper, pour order 28): 434,1518 434,1647 440,1653 583,1653 583,1522 577,1516 575,1518
GND on Top Layer "Mechanical 1-No Net" (hatched 90Degree grid 4 track 5, remove dead copper, pour order 32): 456.16,966 456.16,1080 462.16,1086 605.16,1086 605.16,967.17 604,966
VUSB on Top Layer "Mechanical 1-No Net" (hatched 90Degree grid 4 track 5, remove dead copper, pour order 36): 431,299 431,256 411,256 411,202 373,202 373,299

## Keep-outs
Keep-Out Layer:
  the board outline again, w10

## Other copper
Top Layer:
  rectangle net 5V: 299,1323 341,1336
  rectangle net 5V: 299,1323 344,1361
  rectangle net 5V: 456,1156.3 523,1195
  rectangle net 5V: 299,1314 346,1323
  rectangle net 5V: 490,1170 537,1177
  rectangle net 5V: 526,1165 531,1166
  rectangle net 5V: 525,1169 527,1182
  rectangle net 5V: 527,1156.3 531,1165
  rectangle net 5V: 525,1158.8 534.41,1182
  rectangle net 5V: 515,1169 525,1198
  rectangle net 5V: 515,1158.8 525,1169
  rectangle net 3V3: 561,1275 607,1276
  rectangle net 3V3: 555,1307 609,1309
  rectangle net 3V3: 567,1271 603,1274
  rectangle net 3V3: 568,1276 607,1308
  rectangle net 3V3: 561,1275 599.23,1276
  rectangle net 3V3: 561,1271 607,1275
  rectangle net 3V3: 567,1271 610,1274
  rectangle net 3V3: 701,1295 760,1302
  rectangle net 3V3: 700,1257 747,1317
  rectangle net 3V3: 753,1195 815,1239
  rectangle net 3V3: 747,1332 808,1392
  rectangle net 3V3: 719,1383 779,1420
  rectangle net 3V3: 722,1318 791,1431
  rectangle net 3V3: 797,1386 811,1417
  rectangle net 3V3: 775,1382.4 799,1421
  rectangle net 3V3: 692,1351 699,1383
  rectangle net 3V3: 677,1351 701.84,1395
  rectangle net 3V3: 711,1589 743,1631
  rectangle net 3V3: 709,1490 737,1546
  rectangle net 3V3: 749,1565 785.13,1583
  rectangle net 3V3: 738,1539 791,1555
  rectangle net 3V3: 808,1355 821,1415
  rectangle net 3V3: 713.68,1309 739,1327
  rectangle net VUSB: 383,201 421,243
  rectangle net VUSB: 392.63,239 407,265.65
  rectangle net VUSB: 407,239 412.37,267
  rectangle net VUSB: 407,239 415.13,267.17
  rectangle net VUSB: 407,239 423,267.17
  rectangle net VUSB: 407,201 415,239
  text "TOP" at -6,4055 h200
Bottom Layer:
  text "BOTTOM" at 605,4253 h200

## Text inside footprints (layer, text, board x,y; h text height)
BEEP1: Top Overlay "+" at 3673.5,2850.97 h118.11 r270
C9: Top Overlay "+" at 380.07,888.85 h118.11; Top Overlay "-" at 515.5,895.94 h118.11
C11: Top Overlay "+" at 694.91,1662.15 h118.11 r180; Top Overlay "-" at 559.48,1655.06 h118.11 r180
DB1: Top Overlay "9" at 1742.7,406.24 h50 r180; Top Overlay "5" at 1702.7,526.24 h50 r180; Top Overlay "1" at 2302.7,526.24 h50 r180; Top Overlay "6" at 2262.7,406.24 h50 r180; Top Overlay "母头" at 2050.98,154.83 h118.11 r180
USB1: Top Overlay "+" at 338.87,229.24 h39.37
USB2: Top Overlay "+" at 925.68,227.94 h39.37